# Altium PCB 红外解码.PcbDoc
Units mm, origin at the board's own origin, x right, y up, seen from the top; angles counter-clockwise.
Board outline 152.4 x 101.6 mm, 2 copper layers (Top Layer, Bottom Layer); 8 components, 5 nets, 17 pads, 3 vias.
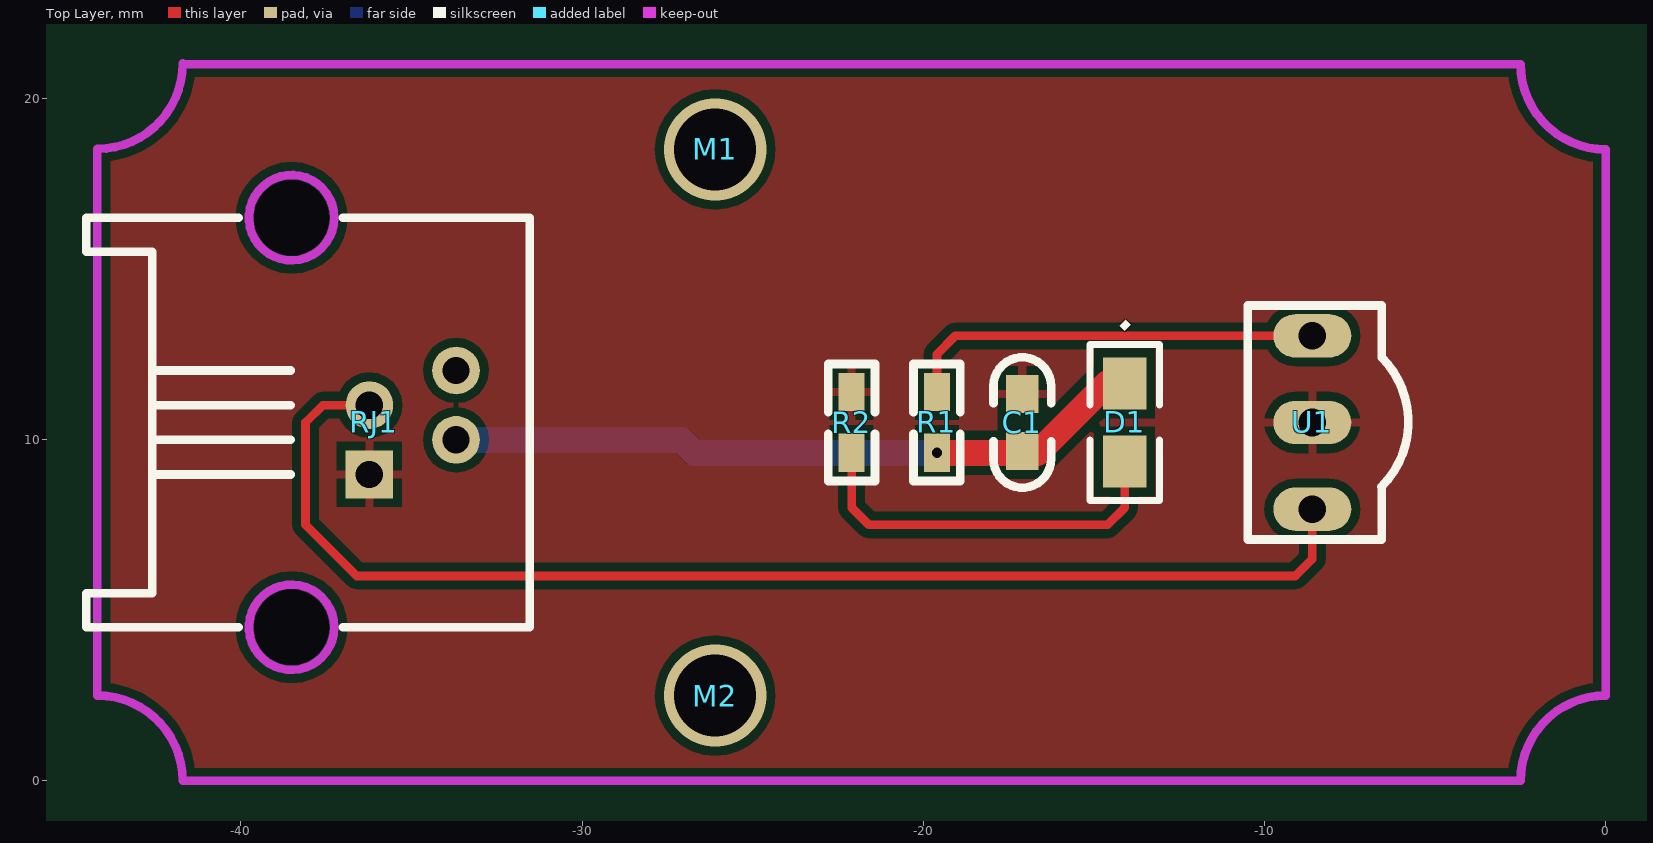
[diagram p0: Top Layer view]
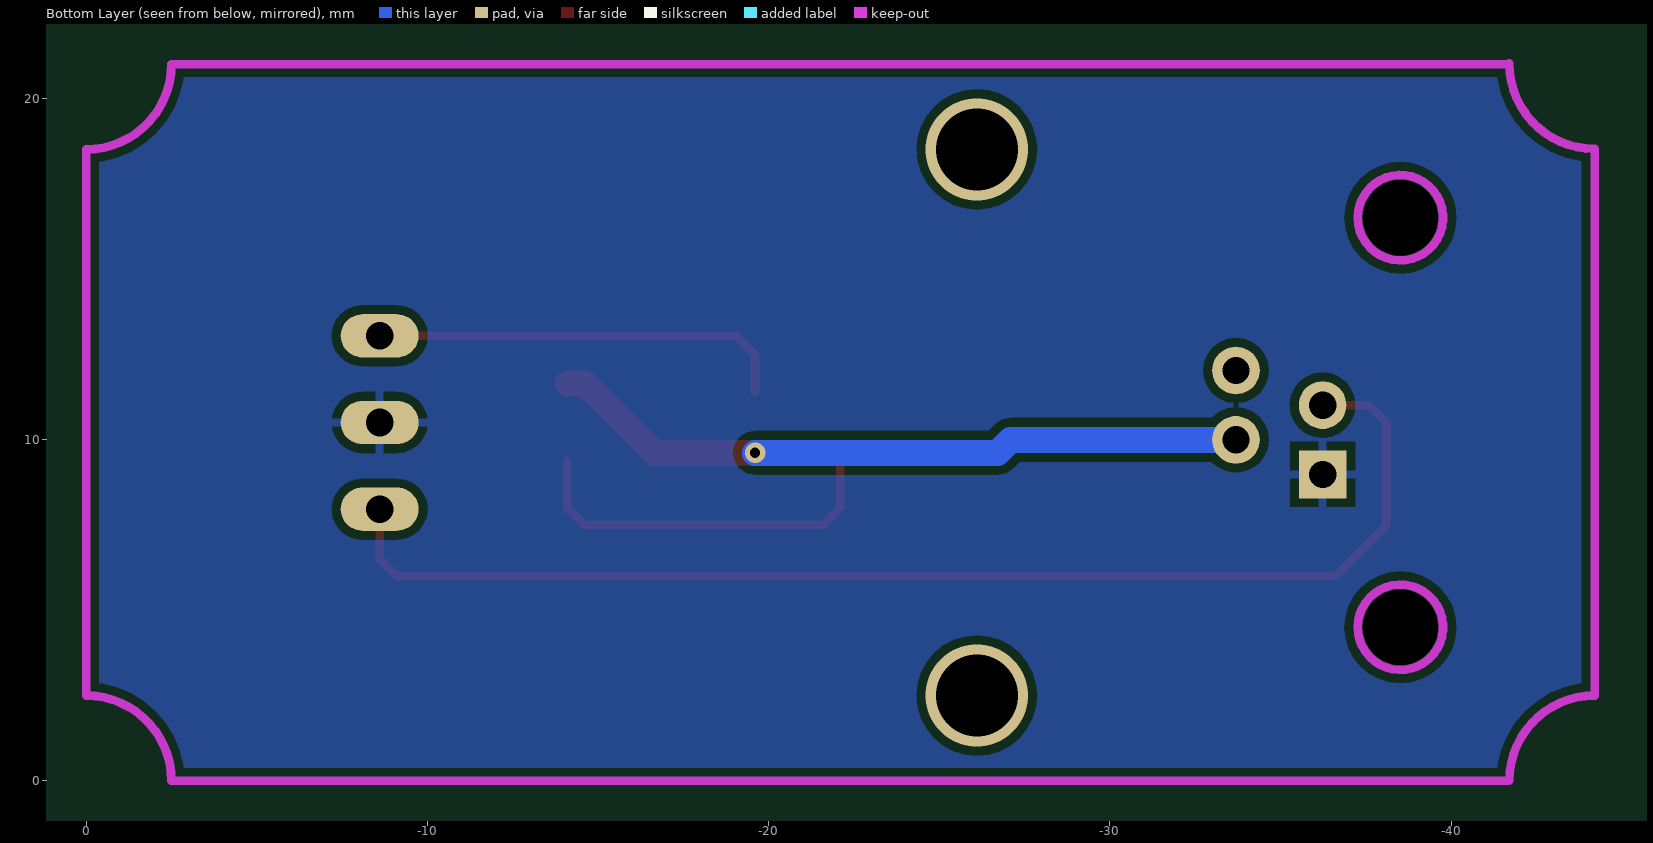
[diagram p1: Bottom Layer view, seen from below]

## Layer stack, top to bottom
Top Solder: solder mask 0.0102, Solder Resist, Dk 3.5
Top Layer: signal copper 0.0356
Dielectric 1: dielectric 0.32, FR-4, Dk 4.8
Bottom Layer: signal copper 0.0356
Bottom Solder: solder mask 0.0102, Solder Resist, Dk 3.5

## Board outline
-112.7,-52.1 39.7,-52.1 39.7,49.5 -112.7,49.5

## Design rules (kind name [scope] priority, off if disabled: settings)
Clearance [All] p1: gap=0.254
PolygonConnect [All] p1: connectstyle=Relief reliefconductorwidth=0.254 reliefentries=4 polygonreliefangle="90 Angle" airgapwidth=0.254
RoutingVias [All] p1: holewidth=0.711 width=1.27 viastyle="Through Hole" minholewidth=0.711 minwidth=1.27 maxholewidth=0.711 maxwidth=1.27
SolderMaskExpansion [All] p1: expansion=0.102
Width [All] p1: maxlimit=2.54 minlimit=0.254 preferedwidth=0.254
29 further rules are at their usual default settings.

## Components (designator, comment, footprint, x,y, rotation, side; value= is the part's Value field where it differs from the comment)
C1 "Cap" 0603_C -17.1,10.5 r180 top
D1 "LED" 0805 -14.1,10.5 r180 top
M1 "M2" M2 -26.1,18.5 r0 top
M2 "M2" M2 -26.1,2.5 r0 top
R1 "Res2" 0603_R -19.6,10.5 r0 top
R2 "Res2" 0603_R -22.1,10.5 r0 top
RJ1 "RJ11" RJ11 -36.1,10.5 r90 top
U1 "1838" 1838 -8.6,10.5 r90 top

## Footprints (in the part's own frame and the unit in brackets; to place one, negate y for a bottom-side part, rotate by r counter-clockwise, add the part's x,y. Pads: shape width x height; smd on the part's side, far side on the other; paste and mask are expansions set on the pad)
0603_C [mil]
  rect 37x44 smd: 1(0,-33) 2(0,33)
  silkscreen extent -33,-75 33,75
0603_R [mil]
  rect 30x44 smd: 1(0,35) 2(0,-35)
  silkscreen extent -27,-67 27,68, body extent -19,-52 20,50, height 21
0805 [mil]
  rect 50x60 smd: 1(0,-45) 2(0,45)
  silkscreen extent -40,-90 40,90
1838 [mil]
  oval 50x90 hole 32: 1(-100,0) 2(0,0) 3(100,0)
  silkscreen extent -135,-111 135,74
M2 [mm]
RJ11 [mm]
  round 2.1 hole 2.2 unplated: 0(-6,2.41) 0(6,2.41)
  rect 1.397x1.397 hole 0.8: 1(-1.524,0.13)
  round 1.397 hole 0.8: 2(-0.508,-2.41) 3(0.508,0.13) 4(1.524,-2.41)
  Keep-Out Layer circle w0.254: c-6,2.41 r1.25
  Keep-Out Layer circle w0.254: c6,2.41 r1.25
  silkscreen extent -6,-4.57 6,8.43

## Part data
C1: "Capacitor"
D1: library part LED1, "Typical RED GaAs LED"
M1 M2: library part M3
R1 R2: "Resistor"

## Via types
v1: diameter 3, hole 2.4, Top Layer to Bottom Layer, 2 vias
v2: diameter 0.6, hole 0.3, Top Layer to Bottom Layer, 1 vias

## Nets (pads, with @x,y where several pads share a name; then routed paths per layer and width w, separated by ;. In a path a pad name is that pad's centre, name@x,y a point inside that pad or via, vN(x,y) a via of type N, cw(c..) or ccw(c..) an arc to the next point about the centre after c; other vN are vias at no path point)
GND: C1.1 R2.1 RJ1.1 U1.2
NetD1_2: D1.2 R2.2 | length 11.4
  Top Layer w0.254: R2.2 -22.1,8 -21.6,7.5 -14.6,7.5 -14.1,8 D1.2
NetR1_1: R1.1 U1.3 | length 12.3
  Top Layer w0.254: R1.1 -19.6,12.5 -19.06,13.04 U1.3
OUT: RJ1.3 U1.1 | length 36.9
  Top Layer w0.254: RJ1.3 -37.592,11.008 -38.1,10.5 -38.1,7.5 -36.6,6 -9.1,6 -8.6,6.5 U1.1
VCC: C1.2 D1.1 R1.2 RJ1.2 | length 20.6
  Top Layer w0.762: v2(-19.6,9.611) -16.649,9.611 -14.617,11.643 D1.1
  Bottom Layer w0.762: RJ1.2 -27.092,9.992 -26.711,9.611 v2(-19.6,9.611)
pads on no net: RJ1.0 RJ1.4
copper on no net:
  other v1: -26.1,2.5 -26.1,18.5

## Polygon pours and split planes (outlines as drawn)
GND on Top Layer "Top Layer-No Net" (solid, remove dead copper, pour order 2): -45.806,21.605 -45.399,22.012 5.02,22.012 5.02,-2.855 4.308,-3.566 3.343,-2.601 -45.222,-2.601
GND on Bottom Layer "Top Layer-No Net" (solid, remove dead copper, pour order 4): -47.07,21.963 2.917,21.963 3.171,21.709 4.543,20.337 4.543,-1.989 -46.791,-1.989 -46.867,-2.065

## Keep-outs
Keep-Out Layer:
  lines w0.254: -41.7,21 -2.5,21 ccw(c0,21) 0,18.5 0,2.5 ccw(c0,0) -2.5,0 -41.7,0 ccw(c-44.2,0) -44.2,2.5 -44.2,18.517 ccw(c-44.2,21.017) -41.7,21.017

## Silkscreen, mask and mechanical layers (free items; w line width, h text height)
Top Overlay:
  text "." at -14.406,13.479 h1.52 r315

## Text inside footprints (layer, text, board x,y; h text height)
RJ1: Mechanical 1 "1" at -38.53,8.722 h1 r270; Mechanical 1 "2" at -32.942,9.738 h1 r270; Mechanical 1 "3" at -38.53,10.754 h1 r270; Mechanical 1 "4" at -32.942,11.77 h1 r270; Mechanical 1 "1" at -43.102,8.468 h1 r270; Mechanical 1 "4" at -43.102,12.024 h1 r270